# Altium PCB Full-Bridge Converter.PcbDoc
Units mil, origin at the board's own origin, x right, y up, seen from the top; angles counter-clockwise.
Board outline 8415 x 6290 mil, 2 copper layers (Top Layer, Bottom Layer); 53 components, 43 nets, 150 pads, 12 vias.
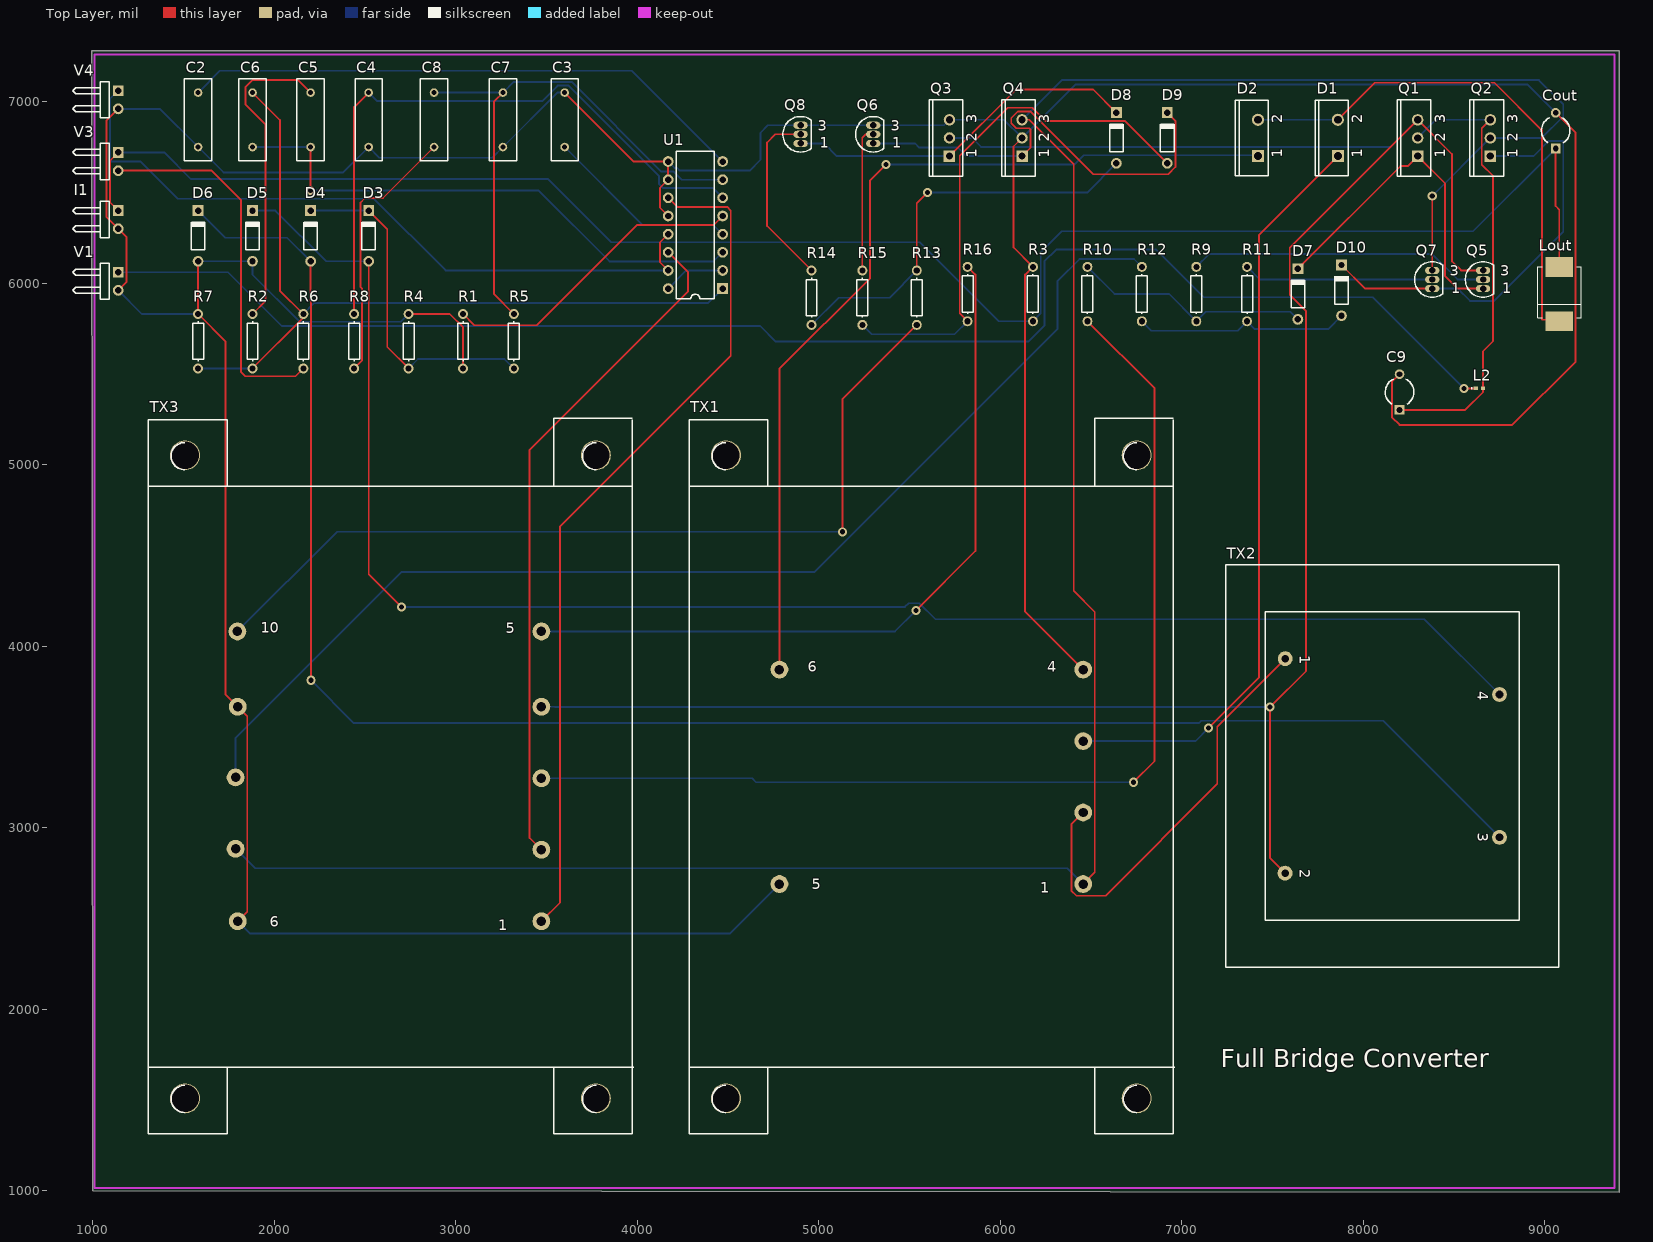
[diagram p0: Top Layer view]
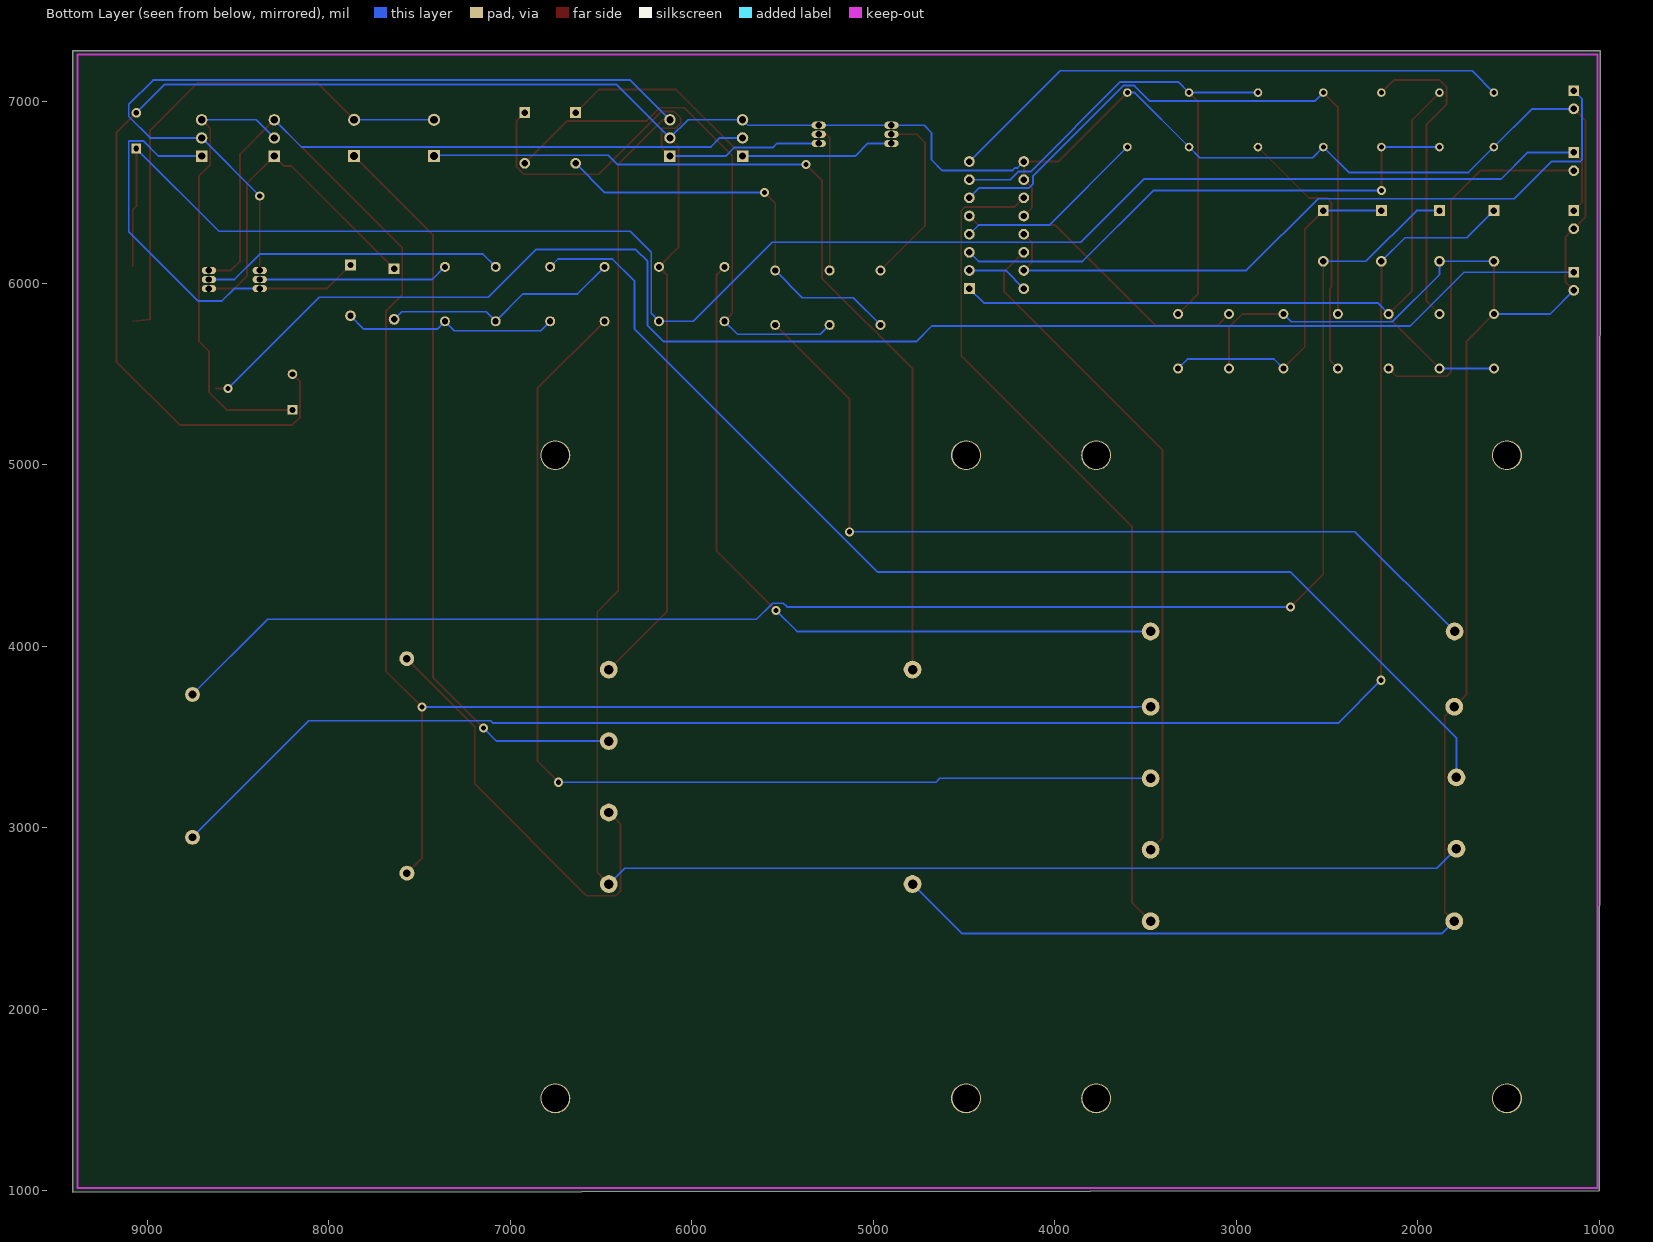
[diagram p1: Bottom Layer view, seen from below]

## Layer stack, top to bottom
Top Layer: signal copper 1.4
Dielectric: dielectric 12.6, FR-4, Dk 4.8
Bottom Layer: signal copper 1.4

## Board outline
1000,1000 9410,990 9410,7280 995,7280

## Design rules (kind name [scope] priority, off if disabled: settings)
Clearance [All] p1: gap=10
FabricationTestPointUsage TestPointUsage [All] p1: valid=0 allowmultiple=FALSE
FabricationTestpoint Testpoint [All] p1: side=3 testpointundercomponent=TRUE minsize=40 maxsize=100 preferedsize=60 minholesize=0 maxholesize=40 preferedholesize=32 testpointgrid=1 allowsidetop=TRUE allowsidebottom=TRUE usegrid=TRUE gridtolerance=0.01
PolygonConnect [All] p1: connectstyle=Relief reliefconductorwidth=10 reliefentries=4 polygonreliefangle="90 Angle"
RoutingVias [All] p1: holewidth=28 width=50 viastyle="Through Hole" minholewidth=28 minwidth=50 maxholewidth=28 maxwidth=50
SilkscreenOverComponentPads [All] p1: minsilkscreentomaskgap=10
SolderMaskExpansion [All] p1: expansion=4
Width [All] p1: maxlimit=10 minlimit=10 preferedwidth=10
25 further rules are at their usual default settings.

## Classes and differential pairs
channel class Ammeter: Ammeter1 Ammeter2 Ammeter3 Ammeter4 Ammeter5

## Components (designator, comment, footprint, x,y, rotation, side; value= is the part's Value field where it differs from the comment)
C2 "Cap" RAD-0.3 1580,6900 r90 top
C3 "Cap" RAD-0.3 3600,6900 r90 top
C4 "Cap" RAD-0.3 2520,6900 r90 top
C5 "Cap" RAD-0.3 2200,6900 r90 top
C6 "Cap" RAD-0.3 1880,6900 r90 top
C7 "Cap" RAD-0.3 3260,6900 r90 top
C8 "Cap" RAD-0.3 2880,6900 r90 top
C9 "Cap2" CAPR5-4X5 8200,5400 r90 top
Cout "Cap2" CAPR5-4X5 9060,6840 r90 top
D1 "MUR830" TO-220AC 7860,6800 r90 top
D2 "MUR830" TO-220AC 7420,6800 r90 top
D3 "Diode 1N4148" DO-35 2520,6260 r90 top
D4 "Diode 1N4148" DO-35 2200,6260 r90 top
D5 "Diode 1N4148" DO-35 1880,6260 r90 top
D6 "Diode 1N4148" DO-35 1580,6260 r90 top
D7 "Diode 1N4148" DO-35 7640,5940 r90 top
D8 "Diode 1N4148" DO-35 6640,6800 r90 top
D9 "Diode 1N4148" DO-35 6920,6800 r90 top
D10 "Diode 1N4148" DO-35 7880,5960 r90 top
I1 "IPWL" HDR1X2H 1140,6400 r270 top
L2 "Inductor" 0402-A 8640,5420 r0 top
Lout "Inductor Iron Dot" DIODE_SMC 9080,5940 r90 top
Q1 "IRF840" TO-220AB 8300,6800 r90 top
Q2 "IRF840" TO-220AB 8700,6800 r90 top
Q3 "IRF840" TO-220AB 5720,6800 r90 top
Q4 "IRF840" TO-220AB 6120,6800 r90 top
Q5 "2N3906" TO-92A 8660,6020 r0 top
Q6 "2N3906" TO-92A 5300,6820 r0 top
Q7 "2N3906" TO-92A 8380,6020 r0 top
Q8 "2N3906" TO-92A 4900,6820 r0 top
R1 "Res1" AXIAL-0.3 3040,5680 r90 top
R2 "Res1" AXIAL-0.3 1880,5680 r90 top
R3 "Res1" AXIAL-0.3 6180,5940 r90 top
R4 "Res1" AXIAL-0.3 2740,5680 r90 top
R5 "Res1" AXIAL-0.3 3320,5680 r90 top
R6 "Res1" AXIAL-0.3 2160,5680 r90 top
R7 "Res1" AXIAL-0.3 1580,5680 r90 top
R8 "Res1" AXIAL-0.3 2440,5680 r90 top
R9 "Res1" AXIAL-0.3 7080,5940 r90 top
R10 "Res1" AXIAL-0.3 6480,5940 r90 top
R11 "Res1" AXIAL-0.3 7360,5940 r90 top
R12 "Res1" AXIAL-0.3 6780,5940 r90 top
R13 "Res1" AXIAL-0.3 5540,5920 r90 top
R14 "Res1" AXIAL-0.3 4960,5920 r90 top
R15 "Res1" AXIAL-0.3 5240,5920 r90 top
R16 "Res1" AXIAL-0.3 5820,5940 r90 top
TX1 "Trans3 Ideal" TRF_6 5620,3280 r0 top
TX2 "Trans Ideal" TRF_4 8160,3340 r270 top
TX3 "Trans5 Ideal" TRF_10 2640,3280 r0 top
U1 "UC3825 PWM" DIP-16 4320,6320 r90 top
V1 "VPWL" HDR1X2H 1140,6060 r270 top
V3 "VSIN" HDR1X2H 1140,6720 r270 top
V4 "VPWL" HDR1X2H 1140,7060 r270 top

## Footprints (in the part's own frame and the unit in brackets; to place one, negate y for a bottom-side part, rotate by r counter-clockwise, add the part's x,y. Pads: shape width x height; smd on the part's side, far side on the other; paste and mask are expansions set on the pad)
0402-A [mm] "Chip Inductor; Body 1 x 0.5 mm (LxW typ)"
  rect 0.6x0.5 smd: 1(-0.5,0) 2(0.5,0)
  silkscreen extent -1.1,-0.15 -1.1,0.15
AXIAL-0.3 [mm] "Resistor; 2 Leads"
  round 1.4 hole 0.85: 1(-3.81,0) 2(3.81,0)
  silkscreen extent -2.77,-0.76 2.77,0.76
CAPR5-4X5 [mm] "Capacitor; 2 Leads"
  rect 1.35x1.35 hole 0.8: 1(-2.5,0)
  round 1.35 hole 0.8: 2(2.5,0)
  silkscreen extent -1.69,-2 1.82,2
DIODE_SMC [mil] "Magnetic-Core Inductor with Winding Polarity Marking; 2 Leads"
  rect 110x150 smd: 1(-150,0) 2(150,0)
  silkscreen extent -130,-120 150,120
DIP-16 [mm] "DIP; 16 Leads; Row Spacing 7.62 mm; Pitch 2.54 mm"
  rect 1.5x1.5 hole 0.9: 1(-8.89,-3.81)
  round 1.5 hole 0.9: 2(-6.35,-3.81) 3(-3.81,-3.81) 4(-1.27,-3.81) 5(1.27,-3.81) 6(3.81,-3.81) 7(6.35,-3.81) 8(8.89,-3.81) 9(8.89,3.81) 10(6.35,3.81) 11(3.81,3.81) 12(1.27,3.81) 13(-1.27,3.81) 14(-3.81,3.81) 15(-6.35,3.81) 16(-8.89,3.81)
  silkscreen extent -10.3,-2.65 10.3,2.65
DO-35 [mm] "Diode, Axial; Body 3.8 x 1.9 mm (LxDia. max), Lead Dia. 0.53 mm (max)"
  round 1.5 hole 0.9: 1(-3.55,0)
  rect 1.5x1.5 hole 0.9: 2(3.55,0)
  silkscreen extent -1.95,-0.95 2.05,0.95
HDR1X2H [mm] "Connector; Header; 2 Position; Right Angle"
  rect 1.5x1.5 hole 0.9: 1(0,0)
  round 1.5 hole 0.9: 2(2.54,0)
  silkscreen extent -1.27,-6.35 3.81,-1.27
RAD-0.3 [mm] "Capacitor; 2 Leads"
  round 1.2 hole 0.7: 1(-3.81,0) 2(3.81,0)
  silkscreen extent -5.71,-1.91 5.71,1.91
TO-92A [mm] "TO, Flat Index; 3 In-Line, Axial Leads; Body Dia. 4.5mm; Leads 0.51 x 0.48 mm (max)"
  oval 2x1 hole 0.9: 1(0,-1.27) 2(0,0) 3(0,1.27)
  silkscreen extent -2.48,-2.48 1.5,2.48
TO-220AB [mm] "TO, Thru-Hole, Vertical, Heatsink Mounted; 3 In-Line Leads; Pitch 2.54 mm"
  rect 1.6x1.6 hole 1: 1(-2.54,0)
  round 1.6 hole 1: 2(0,0) 3(2.54,0)
  silkscreen extent -5.35,-1.85 5.35,2.85
TO-220AC [mm] "TO, Thru-Hole, Vertical, Heatsink Mounted; 3 In-Line Leads (1 Absent); Pitch 2.54 mm"
  rect 1.7x1.7 hole 1.1: 1(-2.54,0)
  round 1.7 hole 1.1: 2(2.54,0)
  silkscreen extent -5.3,-1.45 5.3,3.15
TRF_4 [mil] "Variable Transformer; 4 Leads"
  round 82 hole 42: 1(-590.83,-590) 2(590.83,-590.83) 3(393.33,590.83) 4(-393.33,590.83)
  silkscreen extent -1108,-917 1108,917
TRF_6 [mil] "Three-winding Transformer (Non-Ideal); 6 Leads"
  round 98 hole 52: 1(836.67,-590.83) 2(836.67,-196.67) 3(836.67,196.67) 4(836.67,590.83) 5(-836.67,-590.83) 6(-836.67,590.83)
  round 165 hole 152: MH1(-1131.67,-1771.67) MH2(1131.67,-1771.67) MH3(1131.67,1771.67) MH4(-1131.67,1771.67)
  silkscreen extent -1333,-1967 1342,1975
TRF_10 [mil] "Three-winding Transformer (Non-Ideal); 6 Leads"
  round 98 hole 52: 1(831.67,-795.83) 2(831.67,-401.67) 3(831.67,-8.33) 4(831.67,385.83) 5(831.67,800.83) 6(-841.67,-795.83) 7(-853.33,-396.67) 8(-853.33,-3.33) 9(-841.67,385.83) 10(-843.33,800.83)
  round 165 hole 152: MH1(-1131.67,-1771.67) MH2(1131.67,-1771.67) MH3(1131.67,1771.67) MH4(-1131.67,1771.67)
  silkscreen extent -1333,-1967 1342,1975

## Part data
C2 C3 C4 C5 C6 C7 C8 C9 Cout: "Capacitor"
D1 D2: library part "Diode MUR830", "General Purpose Fast Rectifier"
D3 D4 D5 D6 D7 D8 D9 D10: "High Conductance Fast Diode"
I1: "Piecewise Linear Current Source"
Lout: "Magnetic-Core Inductor with Winding Polarity Marking"
Q1 Q2 Q3 Q4: "HEXFET N-Channel Power MOSFET"
Q5 Q6 Q7 Q8: "PNP General Purpose Amplifier"
R1 R2 R3 R4 R5 R6 R7 R8 R9 R10 R11 R12 R13 R14 R15 R16: "Resistor"
TX1: "Three-winding Transformer (Ideal)"
TX2: "Transformer (Ideal)"
TX3: "Five-winding Transformer (Ideal)"
U1: library part UC3825, "UC3825 PSU Controller"
V1 V4: "Piecewise Linear Voltage Source"
V3: "Sinusoidal Voltage Source"

## Via types
v1: diameter 50, hole 28, Top Layer to Bottom Layer, 12 vias

## Nets (pads, with @x,y where several pads share a name; then routed paths per layer and width w, separated by ;. In a path a pad name is that pad's centre, name@x,y a point inside that pad or via, vN(x,y) a via of type N, cw(c..) or ccw(c..) an arc to the next point about the centre after c; other vN are vias at no path point)
CS1: D3.1 D5.2 TX2.4 | length 9002.3
  Top Layer w10: D3.1 2520,4396 v1(2700,4216)
  Bottom Layer w10: D5.2 2006.47,6399.76 2286,6120.24 D3.1 ; v1(2700,4216) 5474.5,4216 5495,4236.5 5554.5,4236.5 5643,4148 8336.17,4148 TX2.4
CS2: D4.1 D6.2 TX2.3 | length 9961.8
  Top Layer w10: D4.1 2200,5904 2203,5901 v1(2203,3812)
  Bottom Layer w10: D6.2 1729.76,6250 2070.24,6250 D4.1 ; v1(2203,3812) 2439,3576 7095.07,3576 7107.49,3588.42 8109.08,3588.42 TX2.3
CT: C4.2 R8.2 U1.6 | length 3540.7
  Top Layer w10: R8.2 2440,6970 C4.2
  Bottom Layer w10: C4.2 2567,7003 3475.38,7003 3561,7088.62 3621.38,7088.62 4120,6590 4120,6545 4140,6525 4415,6525 U1.6
GND: C2.1 C3.2 C4.1 C7.1 C9.2 Cout.2 D5.1 D6.1 I1.2 Q3.3 Q4.2 Q6.3 Q8.3 R1.1 R3.2 R4.2 R7.2 TX1.4 TX1.5 TX3.6 TX3.9 U1.9 U1.10 U1.12 V1.2 V4.2 | length 25627.8
  Top Layer w10: V1.2 1185,6005 1185,6255 I1.2 1075,6365 1075,6895 V4.2 ; D6.1 R7.2 1732,5678 1732,3732.17 TX3.9 1851,3613.17 1851,2536.83 TX3.6 ; R4.2 2966,5830 3040,5756 R1.1 ; C3.2 3980,6670 U1.9 U1.10 4125,6525 4125,6415 U1.12 ; Q4.2 6073,6753 6073,6197 R3.2 6137,6047 6137,4190.5 TX1.4 ; C9.2 8158,5456.43 8158,5261 8200,5219 8821,5219 9170,5568 9170,6828.43 Cout.2
  Bottom Layer w10: V1.2 1270,5830 R7.2 ; V4.2 1370,6960 C2.1 1720,6610 2380,6610 C4.1 2578.62,6691.38 3201.38,6691.38 C7.1 3560,7050 C3.2 ; D6.1 D5.1 1880,6047 2140,5787 2697,5787 R4.2 ; TX3.6 1866.5,2416 4510.17,2416 TX1.5 ; U1.9 4205.47,6634.53 4220,6634.53 4234.53,6620 4619,6620 4679,6680 4679,6829 4720,6870 Q8.3 Q6.3 5690,6870 Q3.3 6020,6900 Q4.2 6415,7095 8903.43,7095 Cout.2
INV: C6.2 R2.1 R6.2 R7.1 U1.1 | length 4419.9
  Top Layer w10: R2.1 2160,5810 R6.2 2031,5959 2031,6899 C6.2
  Bottom Layer w10: R7.1 R2.1 ; R6.2 2221,5891 4391,5891 U1.1
NetC3_1: C3.1 U1.4 | length 1068.8
  Bottom Layer w10: C3.1 4030,6320 4420,6320 U1.4
NetC5_1: C5.1 C6.1 U1.3 | length 3012.3
  Top Layer w10: v1(2200,6510) C5.1
  Bottom Layer w10: C6.1 C5.1 ; v1(2200,6510) 3457,6510 3847,6120 4420,6120 U1.3
NetC5_2: C5.2 R2.2 | length 1729.5
  Top Layer w10: R2.2 1951,5901 1951,6875 1841,6985 1841,7080 1881,7120 2130,7120 C5.2
NetC8_1: C8.1 R8.1 | length 1466.9
  Top Layer w10: R8.1 2483,5573 2483,5971 2475,5979 2475,6444 2500,6469 2599,6469 C8.1
NetC9_1: C9.1 L2.2 Q1.2 Q2.3 | length 2509.9
  Top Layer w10: C9.1 8561.26,5301.57 8659.69,5400 L2.2 8659.69,5624.69 8715,5680 8715,6591 8653,6653 8653,6853 Q2.3
  Bottom Layer w10: Q1.2 8400,6900 Q2.3
NetCout_1: Cout.1 I1.1 Lout.2 R3.1 V3.1 | length 9913.9
  Top Layer w10: I1.1 1095,6445 1095,6675 V3.1 ; Cout.1 9060,6425 9080,6405 Lout.2
  Bottom Layer w10: V3.1 1394,6720 1541,6573 3509,6573 3857,6225 5556,6225 5991,5790 R3.1 6223,5833 6223,6170 6339,6286 8604.43,6286 Cout.1
NetD1_2: D1.2 D2.2 Lout.1 | length 2896.1
  Top Layer w10: D1.2 8064,7104 8723,7104 8984,6843 8984,5800 Lout.1
  Bottom Layer w10: D2.2 D1.2
NetD2_1: D2.1 TX1.6 | length 5098.8
  Top Layer w10: TX1.6 4783.33,5527.33 5283,6027 5283,6566 v1(5370,6653)
  Bottom Layer w10: v1(5370,6653) 6407,6653 6459,6705 7415,6705 D2.1
NetD3_2: D3.2 D4.2 R4.1 R5.1 | length 1904
  Top Layer w10: D3.2 2622,6297.76 2622,5648 R4.1
  Bottom Layer w10: D4.2 D3.2 ; R4.1 2792,5582 3268,5582 R5.1
NetD7_1: D7.1 R9.1 R10.2 | length 1323.1
  Bottom Layer w10: R10.2 6630,5940 6930,5940 R9.1 7132,5842 7598.24,5842 D7.1
NetD7_2: D7.2 Q1.1 Q5.1 | length 1878
  Top Layer w10: D7.2 8205.24,6645 8245,6645 Q1.1 8451,6549 8451,6039 8520,5970 Q5.1
NetD8_1: D8.1 R13.2 R14.1 | length 2266.1
  Top Layer w10: R13.2 5540,6441 v1(5598,6499)
  Bottom Layer w10: R14.1 5110,5920 5390,5920 R13.2 ; v1(5598,6499) 6478.76,6499 D8.1
NetD8_2: D8.2 Q3.1 Q8.1 | length 1973.7
  Top Layer w10: Q3.1 6087,7067 6512.76,7067 D8.2
  Bottom Layer w10: Q8.1 5030,6770 5100,6700 Q3.1
NetD9_1: D9.1 R15.1 R16.1 | length 2941
  Top Layer w10: R16.1 5777,5833 5777,6702.76 6040.74,6966.5 6176,6966.5 6248.5,6894 6686.24,6894 D9.1
  Bottom Layer w10: R15.1 5292,5718 5748,5718 R16.1
NetD9_2: D9.2 Q4.1 Q6.1 | length 2561.8
  Top Layer w10: Q4.1 6166.5,6746.5 6166.5,6846 6159.5,6853 6087.74,6853 6060.74,6880 6060.74,6909.74 6097.5,6946.5 6166,6946.5 6512.5,6600 6925,6600 6965,6640 6965,6894.76 D9.2
  Bottom Layer w10: Q6.1 5530,6770 5553.5,6746.5 5767,6746.5 5813.5,6700 Q4.1
NetD10_1: D10.1 R11.1 R12.1 | length 1191.2
  Bottom Layer w10: R12.1 6832,5738 7308,5738 R11.1 7403,5747 7806.76,5747 D10.1
NetD10_2: D10.2 Q2.1 Q7.1 | length 2399.5
  Top Layer w10: D10.2 8009.76,5970 Q7.1
  Bottom Layer w10: Q7.1 8520,5970 8588,5902 8721,5902 9102,6283 9102,6784 9022,6784 8938,6700 Q2.1
NetQ5_2: Q5.2 R9.2 | length 1667
  Bottom Layer w10: R9.2 7150,6160 8380,6160 8520,6020 Q5.2
NetQ6_2: Q6.2 R15.2 | length 798.3
  Top Layer w10: R15.2 5240,6800 5260,6820 Q6.2
NetQ7_2: Q7.2 R11.2 | length 1049
  Bottom Layer w10: R11.2 7430,6020 Q7.2
NetQ8_2: Q8.2 R14.2 | length 1010.1
  Top Layer w10: Q8.2 4760,6820 4715,6775 4715,6315 R14.2
NetR1_2: R1.2 U1.5 | length 1705
  Top Layer w10: R1.2 3102,5768 3446,5768 3998,6320 4420,6320 U1.5
NetR6_1: R6.1 V3.2 | length 2062.4
  Top Layer w10: V3.2 1655,6620 1816,6459 1816,5511 1840,5487 2117,5487 R6.1
NetTX1_2: TX1.2 TX2.1 | length 2372.6
  Top Layer w10: TX1.2 6392,3018.67 6392,2653 6420,2625 6580,2625 7195.75,3240.75 7195.75,3556.59 TX2.1
NetTX3_1: TX3.1 U1.11 | length 4722
  Top Layer w10: TX3.1 3575,2587.5 3575,4660 4515,5600 4515,6400 4495,6420 4220,6420 U1.11
NetTX3_2: TX3.2 U1.14 | length 3725.6
  Top Layer w10: TX3.2 3407,2943 3407,5082 4280,5955 4280,6060 U1.14
NetU1_2: U1.2 U1.16 | length 341.4
  Bottom Layer w10: U1.16 4270,6070 U1.2
Q1M: Q1.3 Q3.2 Q5.3 TX2.2 TX3.4 | length 12324.7
  Top Layer w10: TX2.2 7487,2831.34 v1(7487,3665) 7685,3863 7685,5845 7595,5935 7595,6195 Q1.3 8489,6711 8489,6120 8539,6070 Q5.3
  Bottom Layer w10: TX3.4 3545.17,3665.83 3546,3665 v1(7487,3665) ; Q3.2 5844.64,6800 5894.64,6750 8150,6750 Q1.3
Q1P: R10.1 TX3.3 | length 6012
  Top Layer w10: R10.1 6850,5420 6850,3367 v1(6733,3250)
  Bottom Layer w10: TX3.3 4632.33,3271.67 4654,3250 v1(6733,3250)
Q2M: Q2.2 Q4.3 Q7.3 TX1.1 TX3.7 | length 13686.5
  Top Layer w10: Q4.3 6160.8,6900 6405,6655.8 6405,4304 6521,4188 6521,2753.5 TX1.1 ; Q7.3 v1(8380,6480)
  Bottom Layer w10: TX3.7 1894,2776 6369.83,2776 TX1.1 ; Q4.3 6339,7119 8968,7119 9102,6985 9102,6918 8984,6800 Q2.2 v1(8380,6480)
Q2P: R12.2 TX3.8 | length 6476
  Bottom Layer w10: TX3.8 1786.67,3494.67 2700,4408 4975,4408 6316,5749 6316,6012 6437,6133 6737,6133 R12.2
Q3P: R13.1 TX3.10 | length 4870.6
  Top Layer w10: v1(5130,4630) 5130,5360 R13.1
  Bottom Layer w10: TX3.10 2345.83,4630 v1(5130,4630)
Q4P: R16.2 TX3.5 | length 4158.7
  Top Layer w10: v1(5535,4196) 5863,4524 5863,6047 R16.2
  Bottom Layer w10: TX3.5 5419.83,4080.83 v1(5535,4196)
RAMP: C7.2 C8.2 R5.2 U1.7 | length 3122.8
  Top Layer w10: C7.2 3211,7001 3211,5939 R5.2
  Bottom Layer w10: C8.2 C7.2 3318.62,7108.62 3638.38,7108.62 4132.47,6614.53 4200.47,6614.53 4245,6570 U1.7
SEC: D1.1 TX1.3 | length 4167.2
  Top Layer w10: v1(7147,3548) 7425,3826 7425,6265 D1.1
  Bottom Layer w10: TX1.3 7075.67,3476.67 v1(7147,3548)
SS: C2.2 U1.8 | length 3146.8
  Bottom Layer w10: C2.2 1700,7170 3970,7170 U1.8
VCC: U1.13 U1.15 V4.1 | length 3963.6
  Top Layer w10: U1.15 4125,6115 4125,6225 U1.13
  Bottom Layer w10: V4.1 1095,7015 1095,6680 1105,6670 1264,6670 1469,6465 2549,6465 2944,6070 U1.15
VIN: L2.1 V1.1 | length 8372.8
  Top Layer w10: v1(8554,5420) L2.1
  Bottom Layer w10: V1.1 1745,6060 2041,5764 4677,5764 4763,5678 6155,5678 6243,5766 6243,6120 6308,6185 6859,6185 7122,5922 8052,5922 v1(8554,5420)
pads on no net: TX1.MH1 TX1.MH2 TX1.MH3 TX1.MH4 TX3.MH1 TX3.MH2 TX3.MH3 TX3.MH4

## Keep-outs
Keep-Out Layer:
  lines w10: 1010,7260 1010,1015 9380,1015 ; 1015,7260 9385,7260 9385,1015

## Silkscreen, mask and mechanical layers (free items; w line width, h text height)
Top Overlay:
  text "Full Bridge Converter" at 7215,1680 h100

## Text inside footprints (layer, text, board x,y; h text height)
D1: Top Overlay "2" at 7994.84,6880.31 h59.05 r90; Top Overlay "1" at 7994.84,6690.16 h59.06 r90
D2: Top Overlay "2" at 7554.84,6880.31 h59.05 r90; Top Overlay "1" at 7554.84,6690.16 h59.06 r90
Q1: Top Overlay "2" at 8450.59,6780.31 h59.06 r90; Top Overlay "1" at 8450.59,6690.16 h59.06 r90; Top Overlay "3" at 8450.59,6880.31 h59.06 r90
Q2: Top Overlay "2" at 8850.59,6780.31 h59.06 r90; Top Overlay "1" at 8850.59,6690.16 h59.06 r90; Top Overlay "3" at 8850.59,6880.31 h59.06 r90
Q3: Top Overlay "2" at 5870.59,6780.31 h59.06 r90; Top Overlay "1" at 5870.59,6690.16 h59.06 r90; Top Overlay "3" at 5870.59,6880.31 h59.06 r90
Q4: Top Overlay "2" at 6270.59,6780.31 h59.06 r90; Top Overlay "1" at 6270.59,6690.16 h59.06 r90; Top Overlay "3" at 6270.59,6880.31 h59.06 r90
Q5: Top Overlay "3" at 8755.67,6040.08 h59.05; Top Overlay "1" at 8764.72,5945.2 h59.05
Q6: Top Overlay "3" at 5395.67,6840.08 h59.05; Top Overlay "1" at 5404.72,6745.2 h59.05
Q7: Top Overlay "3" at 8475.67,6040.08 h59.05; Top Overlay "1" at 8484.72,5945.2 h59.05
Q8: Top Overlay "3" at 4995.67,6840.08 h59.05; Top Overlay "1" at 5004.72,6745.2 h59.05
TX1: Top Overlay "6" at 4940,3860 h59.06; Top Overlay "4" at 6260,3860 h59.06; Top Overlay "1" at 6220,2640 h59.06; Top Overlay "5" at 4960,2660 h59.06
TX2: Top Overlay "3" at 8630,2970.83 h59.06 r270; Top Overlay "4" at 8630,3750.83 h59.06 r270; Top Overlay "2" at 7650,2770.83 h59.06 r270; Top Overlay "1" at 7650,3950.83 h59.06 r270
TX3: Top Overlay "10" at 1925,4075 h59.05; Top Overlay "5" at 3275,4070 h59.05; Top Overlay "6" at 1975,2455 h59.05; Top Overlay "1" at 3235,2435 h59.06